# Altium PCB 1050.PcbDoc
Units mm, origin at the board's own origin, x right, y up, seen from the top; angles counter-clockwise.
Board outline 100.33 x 100.33 mm, 2 copper layers (Top Layer, Bottom Layer); 54 components, 92 nets, 248 pads, 132 vias.
Unrouted connection lines stored in the file: 2.
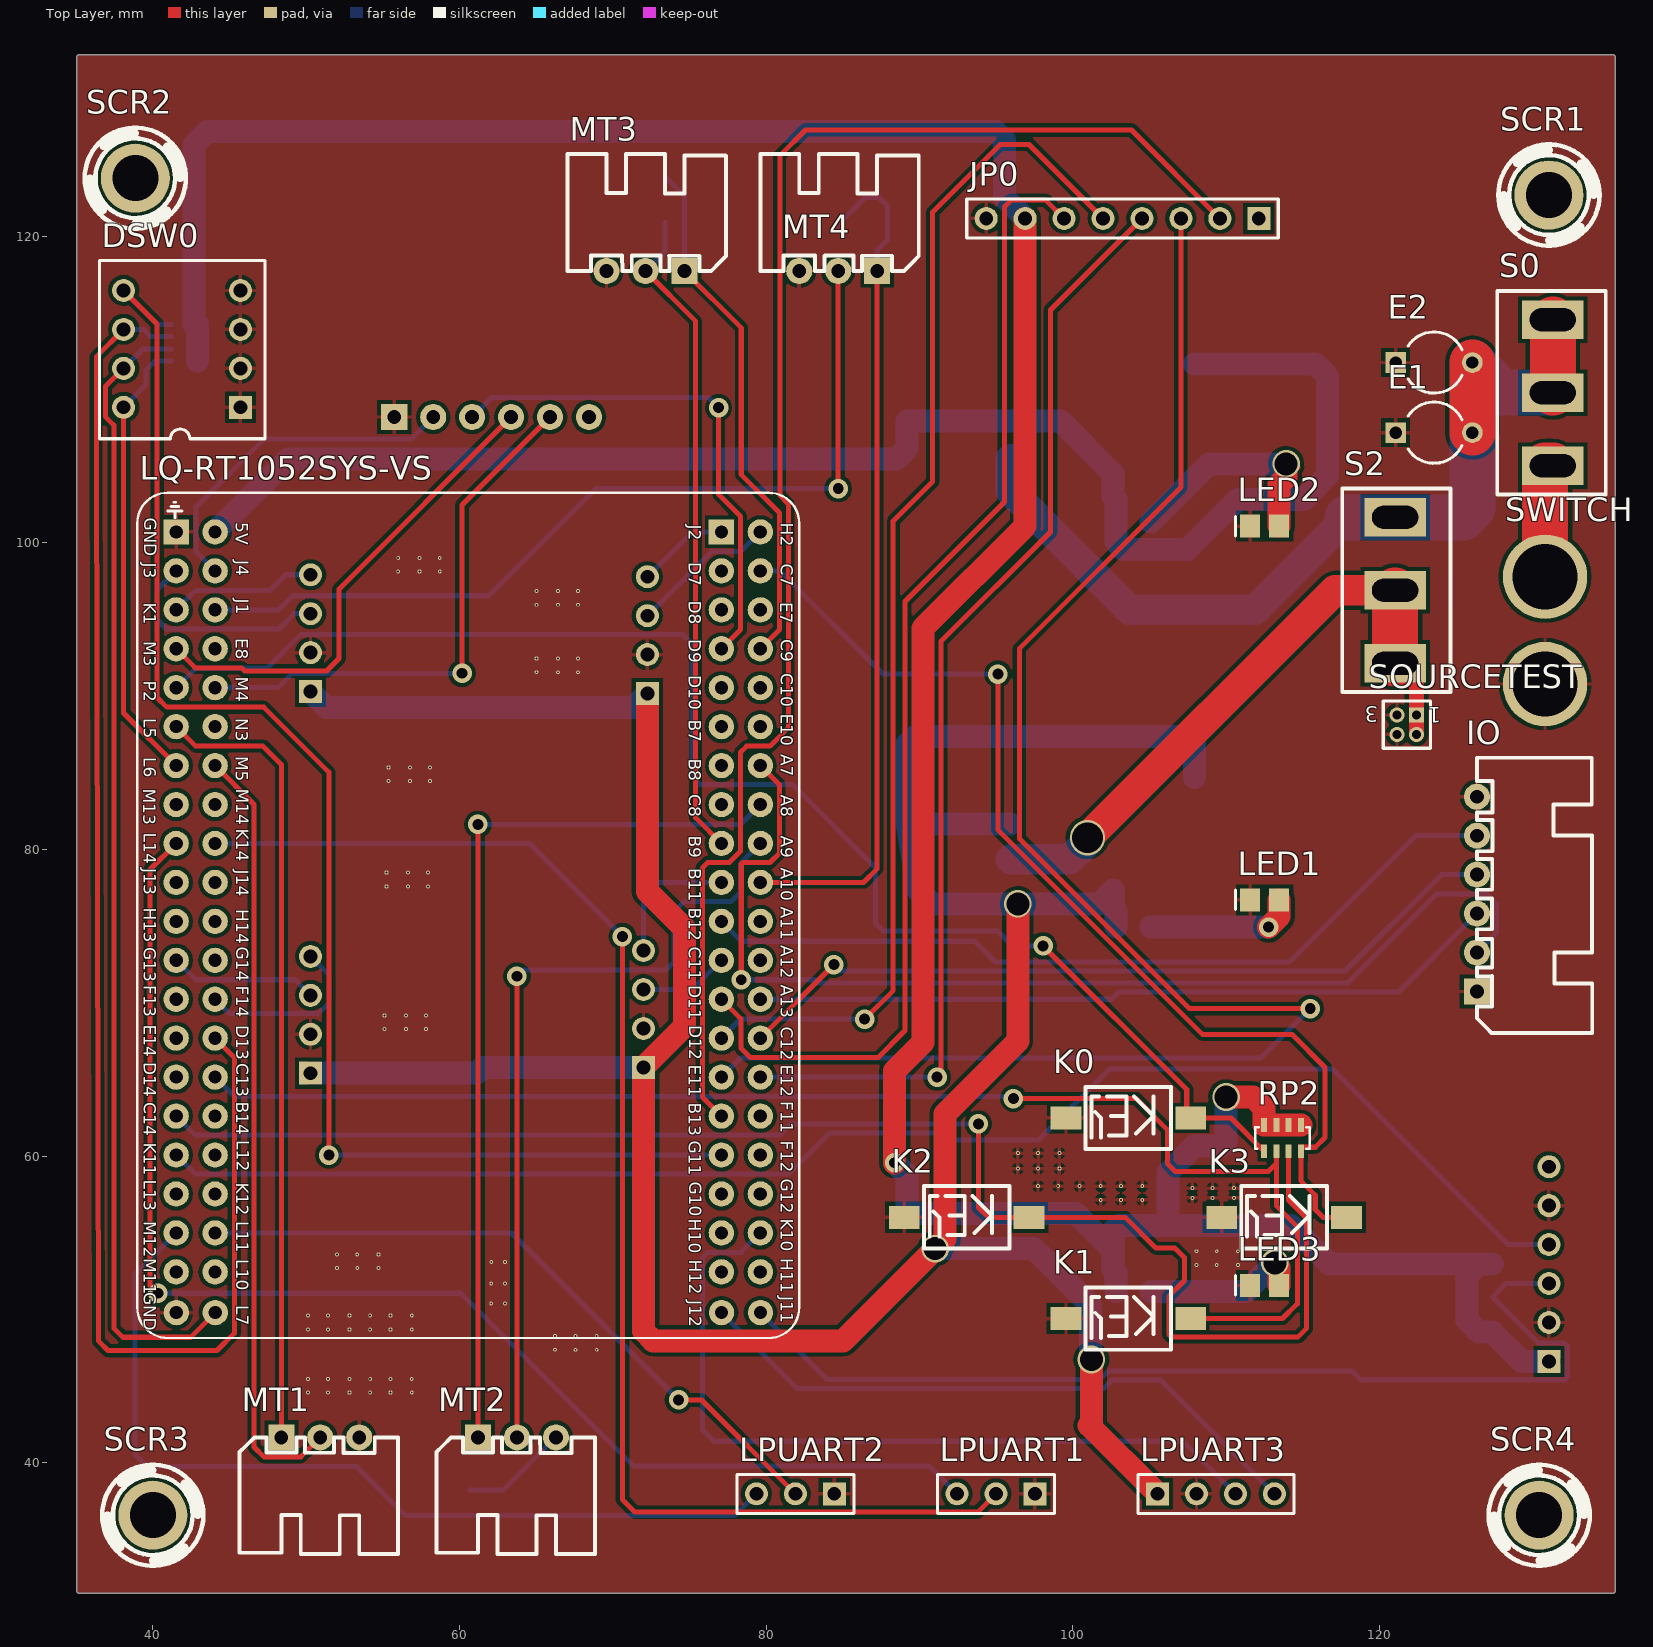
[diagram p0: Top Layer view]
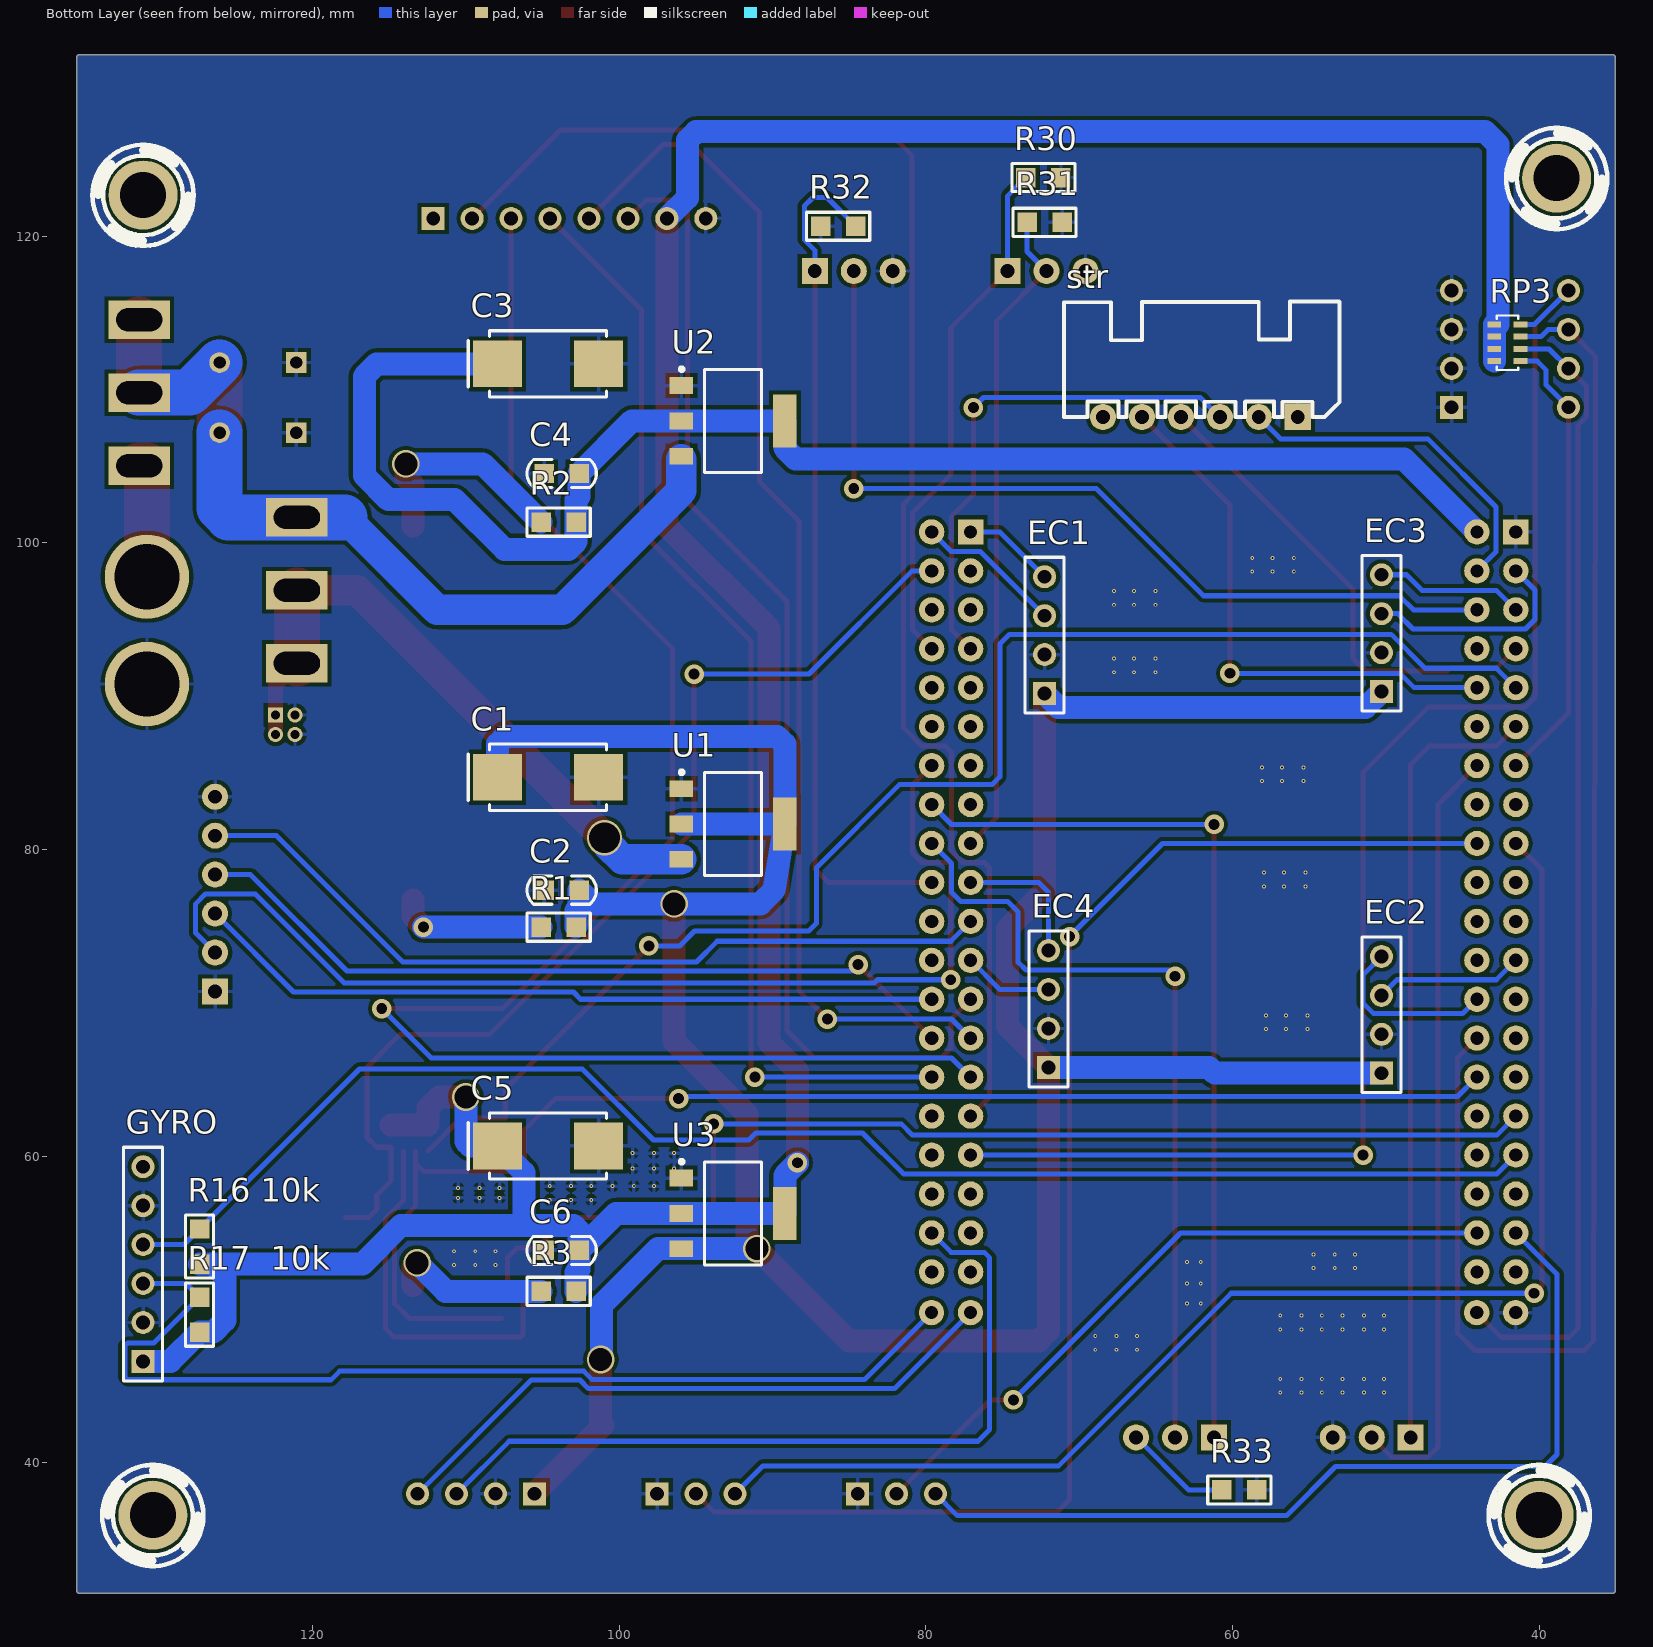
[diagram p1: Bottom Layer view, seen from below]
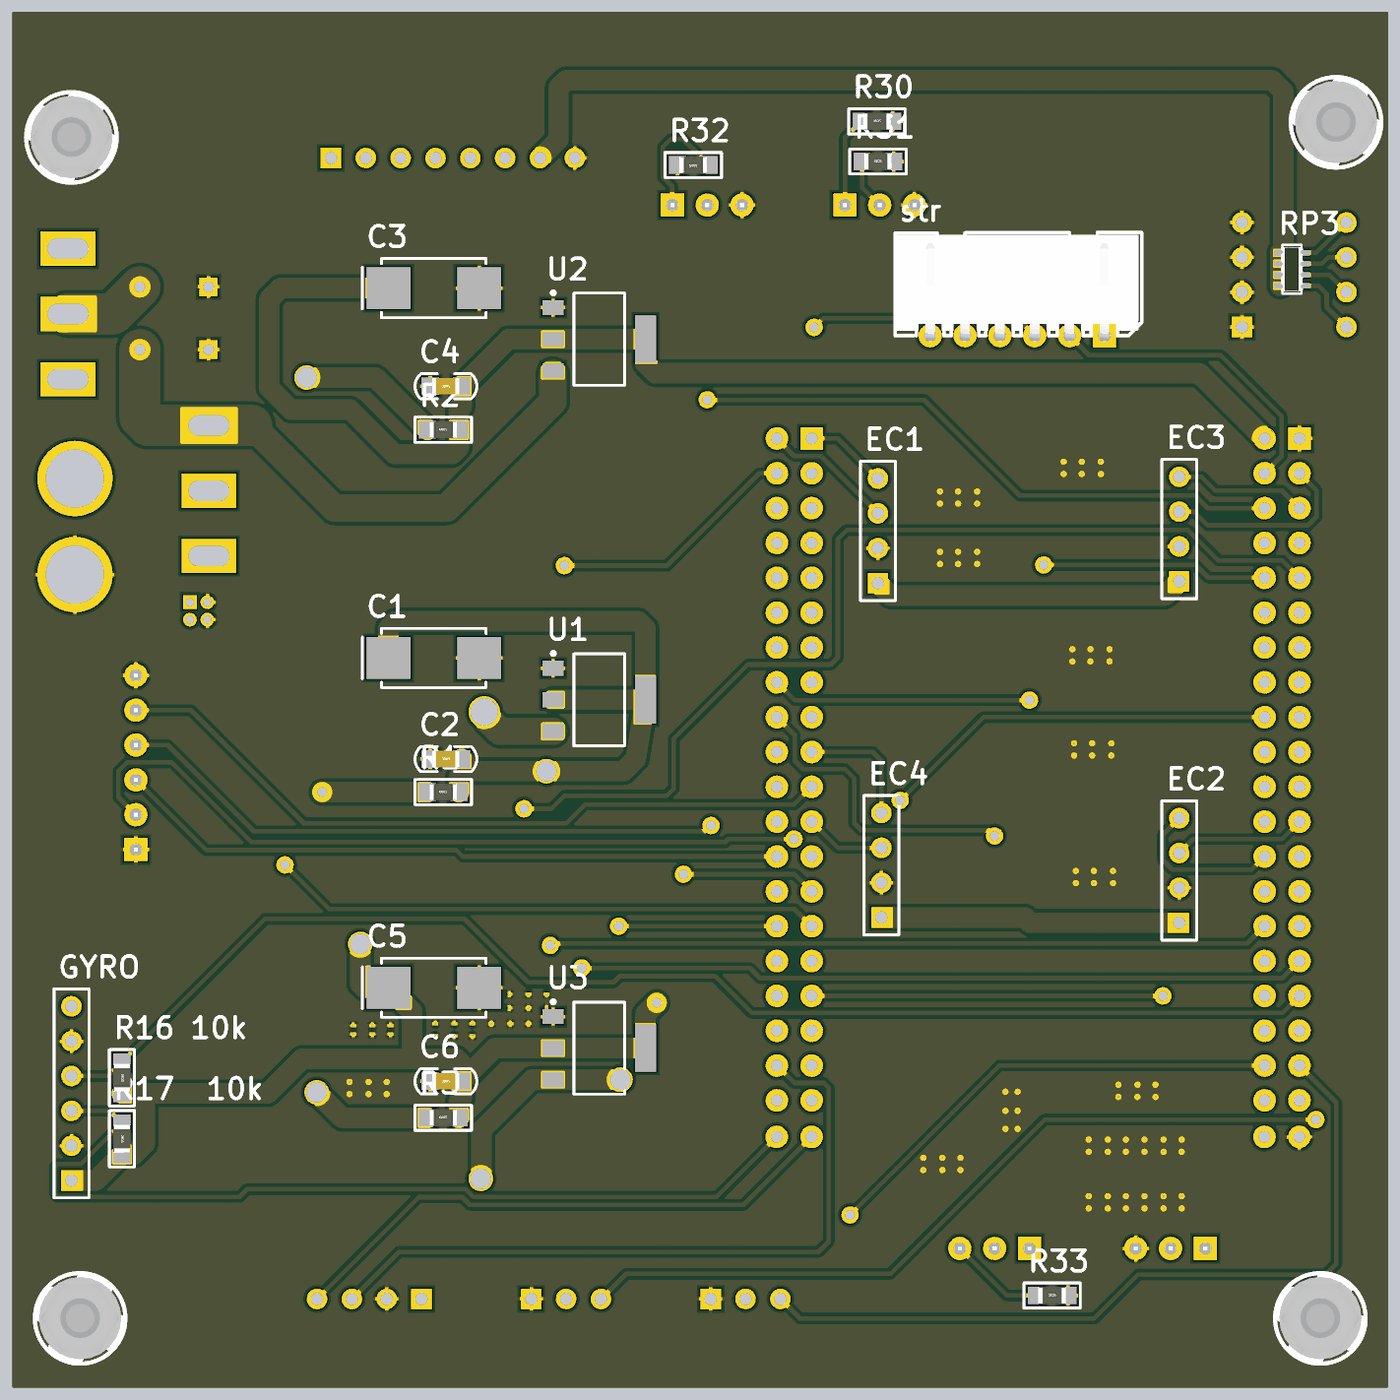
[diagram p2: 3D render of the assembled board from below, using the file's embedded part models]

## Layer stack, top to bottom
Top Solder: solder mask 0.0102, Solder Resist, Dk 3.5
Top Layer: signal copper 0.0356
Dielectric 1: dielectric 0.32, FR-4, Dk 4.8
Bottom Layer: signal copper 0.0356
Bottom Solder: solder mask 0.0102, Solder Resist, Dk 3.5

## Board outline
35.052,31.623 ccw(c35.179,31.623) 35.179,31.496 135.255,31.496 ccw(c135.255,31.623) 135.382,31.623 135.382,131.699 ccw(c135.255,131.699) 135.255,131.826 35.179,131.826 ccw(c35.179,131.699) 35.052,131.699

## Design rules (kind name [scope] priority, off if disabled: settings)
Clearance [All] p1: gap=0.254 ignorepadtopadclearanceinfootprint=FALSE except(0: Arc-Hole Track-Hole SMDPad-Hole THPad-Hole Via-Hole Fill-Hole Poly-Hole Region-Hole Text-Hole)
HoleSize HoleSize_1 [IsVia] p1: absolutevalues=TRUE maxlimit=4 minlimit=0.254 maxpercent=80.000 minpercent=20.000
HoleSize [All] p2: absolutevalues=TRUE maxlimit=4 minlimit=0.025 maxpercent=80.000 minpercent=20.000
PolygonConnect [All] p1: connectstyle=Relief reliefconductorwidth=0.254 reliefentries=4 polygonreliefangle="90 Angle" airgapwidth=0.254
RoutingVias [All] p1: holewidth=0.711 width=1.27 viastyle="Through Hole" minholewidth=0.711 minwidth=1.27 maxholewidth=0.711 maxwidth=1.27
SolderMaskExpansion [All] p1: expansion=0.102
Width Width_1 [InNetClass('New Class')] p1: maxlimit=3 minlimit=0.254 preferedwidth=0.33 minimp=50.000000 maximp=50.000000 favimp=50.000000
Width [InNetClass('电源')] p2: maxlimit=4 minlimit=0.254 preferedwidth=3 minimp=50.000000 maximp=50.000000 favimp=50.000000
Width Width1 [InNetClass('稳压')] p3: maxlimit=1.5 minlimit=0.254 preferedwidth=1.5 minimp=50.000000 maximp=50.000000 favimp=50.000000
29 further rules are at their usual default settings.

## Classes and differential pairs
net class "New Class": A7 A8 A9 A10 A11 A12 A13 B7 B8 B9 B11 B12 B13 B14 C7 C8 C9 C10 C11 C12 C13 C14 D7 D8 D9 D10 D11 D12 D13 D14 E7 E8 E10 E11 E12 E14 F11 F12 F13 F14 G10 G11 G12 G13 G14 GND H2 H10 H11 H12 H13 H14 J1 J2 J3 J4 J11 J12 J13 J14 K1 K10 K11 K12 K14 L5 L6 L7 L10 L11 L12 L13 L14 M3 M4 M5 M11 M12 M13 M14 N3 NetMT2_3 NetS0_VCC1 P2
net class 稳压: 3V3_EXT 5V_INTER 5V_OUTER NetLED1_1 NetLED2_1 NetLED3_1
net class 电源: 12V 12V_0 NetS0_VCC1

## Components (designator, comment, footprint, x,y, rotation, side; value= is the part's Value field where it differs from the comment)
C1 "Cap Pol" CAP-7343 104.648,84.709 r180 bottom value=220uF
C2 "Cap" "C 0805" 103.759,77.343 r180 bottom value=100nF
C3 "Cap Pol" CAP-7343 104.648,111.675 r180 bottom value=220uF
C4 "Cap" "C 0805" 103.759,104.521 r180 bottom value=100nF
C5 "Cap Pol" CAP-7343 104.648,60.664 r180 bottom value=220uF
C6 "Cap" "C 0805" 103.759,53.848 r180 bottom value=100nF
DSW0 "SW-DIP4" LQ_DIP-4-KEY 45.72,108.839 r90 top
E1 "220UF/16V" CAPR5-4X5 123.571,107.188 r0 top
E2 "10UF/16V" CAPR5-4X5 123.571,111.76 r0 top
EC1 "EC1" HDR1X4 72.263,90.17 r90 bottom
EC2 "EC2" HDR1X4 50.292,65.405 r90 bottom
EC3 "EC3" HDR1X4 50.292,90.297 r90 bottom
EC4 "EC4" HDR1X4 72.009,65.786 r90 bottom
GYRO "GYRO" HDR1X6 131.064,46.609 r90 bottom
IO "IO" XH2.54-6P_H 126.365,70.739 r90 top
JP0 "TFT" HDR1X8 112.141,121.158 r180 top
K0 "微动开关" surface_key 103.632,62.484 r180 top
K1 "微动开关" surface_key 103.632,49.403 r180 top
K2 "微动开关" surface_key 93.091,56.007 r180 top
K3 "微动开关" surface_key 113.792,56.007 r180 top
LED1 "LED0" LED_0805 112.522,76.708 r180 top
LED2 "LED0" LED_0805 112.522,101.092 r180 top
LED3 "LED0" LED_0805 112.522,51.562 r180 top
LPUART1 "LPUART1" HDR1X3 97.536,37.973 r180 top
LPUART2 "LPUART2" HDR1X3 84.455,37.973 r180 top
LPUART3 "HDR-1X4" HDR1X4 105.537,37.973 r0 top
LQ-RT1052SYS-VS "LQ-RT1052SYS-VC3" LQ-RT1052SYS-VC3 60.579,76.581 r270 top
MT1 "MT1" XH2.54-3P_H 48.387,41.656 r0 top
MT2 "MT2" XH2.54-3P_H 61.214,41.656 r0 top
MT3 "MT3" XH2.54-3P_H 74.676,117.729 r180 top
MT4 "MT4" XH2.54-3P_H 87.249,117.729 r180 top
R1 "Res1" "R 0805" 103.957,74.93 r180 bottom value=200R
R2 "Res1" "R 0805" 103.957,101.346 r180 bottom value=200R
R3 "Res1" "R 0805" 103.957,51.181 r180 bottom value=100R
"R16 10k" "Res1" "R 0805" 127.381,54.102 r270 bottom
"R17  10k" "Res1" "R 0805" 127.381,49.657 r270 bottom
R30 "Res1" "R 0805" 72.339,123.825 r180 bottom
R31 "Res1" "R 0805" 72.263,120.904 r180 bottom
R32 "Res1" "R 0805" 85.725,120.65 r0 bottom value=2K
R33 "Res1" "R 0805" 59.563,38.227 r180 bottom value=2K
RP2 "1K" LQ_RP4-0603 114.884,62.027 r0 top
RP3 "1K" LQ_RP4-0603 42.926,114.249 r90 bottom
S0 "Switcher" ThreeSwitcher 131.318,105.029 r270 top
S2 "Switcher" ThreeSwitcher 121.031,101.663 r90 top
SCR1 "螺丝孔" LQ_SCROW3&5mm 131.064,122.682 r0 top
SCR2 "螺丝孔" LQ_SCROW3&5mm 38.862,123.78 r0 top
SCR3 "螺丝孔" LQ_SCROW3&5mm 40.005,36.576 r0 top
SCR4 "螺丝孔" LQ_SCROW3&5mm 130.429,36.576 r0 top
SOURCETEST "SourceTest" MHDR2X2 122.428,88.773 r180 top
str "str" XH2.54-6P_H 55.753,108.204 r0 bottom
SWITCH "XT60" XT60 130.81,97.79 r0 top
U1 "LM1117-5.0" SOT-223 92.583,81.661 r270 bottom
U2 "LM1117-5.0" SOT-223 92.583,107.95 r270 bottom
U3 "LM1117-3.3" SOT-223 92.583,56.261 r270 bottom

## Footprints (in the part's own frame and the unit in brackets; to place one, negate y for a bottom-side part, rotate by r counter-clockwise, add the part's x,y. Pads: shape width x height; smd on the part's side, far side on the other; paste and mask are expansions set on the pad)
"C 0805" [mil] "无极性贴片电容"
  rect 50x50 smd: 1(-45,0) 2(45,0)
  silkscreen extent -89,-36 89,36, body extent -39,-24 39,24, height 20
CAP-7343 [mm] "钽电容"
  rect 3.2x3.05 smd: 1(-3.302,0) 2(3.302,0)
  silkscreen extent -5.21,-2.16 3.81,2.16, body extent -3.68,-1.91 3.68,1.91, height 2.95
CAPR5-4X5 [mm] "Capacitor; 2 Leads"
  rect 1.35x1.35 hole 0.8: 1(-2.5,0)
  round 1.35 hole 0.8: 2(2.5,0)
  silkscreen extent -1.69,-2 1.82,2
HDR1X3 [mm] "Connector; Header; 3 Position"
  rect 1.5x1.5 hole 0.9: 1(0,0)
  round 1.5 hole 0.9: 2(2.54,0) 3(5.08,0)
  silkscreen extent -1.27,-1.27 6.35,1.27
HDR1X4 [mm] "Connector; Header; 4 Position"
  rect 1.5x1.5 hole 0.9: 1(0,0)
  round 1.5 hole 0.9: 2(2.54,0) 3(5.08,0) 4(7.62,0)
  silkscreen extent -1.27,-1.27 8.89,1.27
HDR1X6 [mm] "Connector; Header; 6 Position"
  rect 1.5x1.5 hole 0.9: 1(0,0)
  round 1.5 hole 0.9: 2(2.54,0) 3(5.08,0) 4(7.62,0) 5(10.16,0) 6(12.7,0)
  silkscreen extent -1.27,-1.27 13.97,1.27
HDR1X8 [mm] "Connector; Header; 8 Position"
  rect 1.5x1.5 hole 0.9: 1(0,0)
  round 1.5 hole 0.9: 2(2.54,0) 3(5.08,0) 4(7.62,0) 5(10.16,0) 6(12.7,0) 7(15.24,0) 8(17.78,0)
  silkscreen extent -1.27,-1.27 19.05,1.27
LED_0805 [mm] "贴片二极管"
  rect 1.3x1.5 smd: 1(-0.95,0) 2(0.95,0)
  silkscreen extent 1.9,-0.63 1.9,0.64
LQ-RT1052SYS-VC3 [mm]
  rect 1.65x1.65 hole 0.86: 1(-24.13,-19.05) 43(-24.13,16.51)
  round 1.65 hole 0.86: 2(-24.13,-16.51) 3(-21.59,-19.05) 4(-21.59,-16.51) 5(-19.05,-19.05) 6(-19.05,-16.51) 7(-16.51,-19.05) 8(-16.51,-16.51) 9(-13.97,-19.05) 10(-13.97,-16.51) 11(-11.43,-19.05) 12(-11.43,-16.51) 13(-8.89,-19.05) 14(-8.89,-16.51) 15(-6.35,-19.05) 16(-6.35,-16.51) 17(-3.81,-19.05) 18(-3.81,-16.51) 19(-1.27,-19.05) 20(-1.27,-16.51) 21(1.27,-19.05) 22(1.27,-16.51) 23(3.81,-19.05) 24(3.81,-16.51) 25(6.35,-19.05) 26(6.35,-16.51) 27(8.89,-19.05) 28(8.89,-16.51) 29(11.43,-19.05) 30(11.43,-16.51) 31(13.97,-19.05) 32(13.97,-16.51) 33(16.51,-19.05) 34(16.51,-16.51) 35(19.05,-19.05) 36(19.05,-16.51) 37(21.59,-19.05) 38(21.59,-16.51) 39(24.13,-19.05) 40(24.13,-16.51) 41(26.79,-19.04) 42(26.79,-16.5) 44(-24.13,19.05) 45(-21.59,16.51) 46(-21.59,19.05) 47(-19.05,16.51) 48(-19.05,19.05) 49(-16.51,16.51) 50(-16.51,19.05) 51(-13.97,16.51) 52(-13.97,19.05) 53(-11.43,16.51) 54(-11.43,19.05) 55(-8.89,16.51) 56(-8.89,19.05) 57(-6.35,16.51) 58(-6.35,19.05) 59(-3.81,16.51) 60(-3.81,19.05) 61(-1.27,16.51) 62(-1.27,19.05) 63(1.27,16.51) 64(1.27,19.05) 65(3.81,16.51) 66(3.81,19.05) 67(6.35,16.51) 68(6.35,19.05) 69(8.89,16.51) 70(8.89,19.05) 71(11.43,16.51) 72(11.43,19.05) 73(13.97,16.51) 74(13.97,19.05) 75(16.51,16.51) 76(16.51,19.05) 77(19.05,16.51) 78(19.05,19.05) 79(21.59,16.51) 80(21.59,19.05) 81(24.13,16.51) 82(24.13,19.05) 83(26.79,16.52) 84(26.79,19.06)
  silkscreen extent -26.69,-21.59 28.45,21.59
LQ_DIP-4-KEY [mm]
  rect 1.5x1.5 hole 0.9: 1(0,0)
  round 1.5 hole 0.9: 2(2.54,0) 3(5.08,0) 4(7.62,0) 5(7.62,7.62) 6(5.08,7.62) 7(2.54,7.62) 8(0,7.62)
  silkscreen extent -2.05,-1.59 9.57,9.2
LQ_RP4-0603 [mm]
  rect 0.4x0.889 smd: 1(-2.4,-1.702) 2(-1.6,-1.702) 3(-0.8,-1.702) 4(0,-1.702) 5(0,0) 6(-0.8,0) 7(-1.6,0) 8(-2.4,0)
  silkscreen extent -2.98,-1.55 0.58,-0.15, body extent -2.8,-1.64 0.4,-0.04, height 0.55
LQ_SCROW3&5mm [mm]
  round 4.5 hole 3: 1(0,0)
  silkscreen extent -3.3,-3.3 3.3,3.3, body extent -3,-3 3,3, height 1.3
MHDR2X2 [mm] "Connector; Header; 2x2 Position"
  rect 1x1 hole 0.6: 1(0,0)
  round 1 hole 0.6: 2(0,1.27) 3(1.27,0) 4(1.27,1.27)
  silkscreen extent -0.9,-0.9 2.17,2.17
"R 0805" [mil] "1/8W贴片电阻"
  rect 50x50 smd: 1(-45,0) 2(45,0)
  silkscreen extent -81,-36 81,36, body extent -39,-25 39,25, height 20
SOT-223 [mm]
  rect 1.1x1.55 smd: 1(-2.3,-3.375) 2(0,-3.375) 3(2.3,-3.375)
  rect 3.45x1.55 smd: 4(0,3.375)
  silkscreen extent -3.5,-3.48 3.35,1.85, body extent -3.3,-3.94 3.3,3.43, height 0.8
surface_key [mm]
  rect 2x1.5 smd: 1(4.064,0) 2(-4.064,0)
  silkscreen extent -2.79,-2.03 2.79,2.03
ThreeSwitcher [mm]
  rect 2.5x4 hole 1.5 slot 3 at 90 deg: 1(0,0) 2(-4.763,0) 3(-9.525,0)
  silkscreen extent -11.4,-3.62 1.87,3.45
XH2.54-3P_H [mm] "接插件，3P"
  rect 1.7x1.7 hole 0.9: 1(0,0)
  round 1.7 hole 0.9: 2(2.54,0) 3(5.08,0)
  silkscreen extent -2.72,-7.62 7.62,0, body extent -2.5,-7.35 7.58,0.35, height 5.73
XH2.54-6P_H [mm] "接插件，6P"
  rect 1.7x1.7 hole 0.9: 1(0,0)
  round 1.7 hole 0.9: 2(2.54,0) 3(5.08,0) 4(7.62,0) 5(10.16,0) 6(12.7,0)
  silkscreen extent -2.72,-7.53 15.24,0, body extent -2.5,-7.35 15.2,0.35, height 5.75
XT60 [mm]
  round 5.5 hole 4.25: 0(0,0) 1(0,-7)

## Part data
C1 C3 C5: "极性电解电容", LatestRevisionDate=17-Jul-2002, LatestRevisionNote="Re-released for DXP Platform.", PackageReference=RB7.6-15, Published=8-Jun-2000, Publisher="Altium Limited", Vol=35V
C2 C4 C6: "无极性电容", LatestRevisionDate=17-Jul-2002, LatestRevisionNote="Re-released for DXP Platform.", PackageReference=RAD-0.3, Published=8-Jun-2000, Publisher="Altium Limited"
E1 E2: library part C-CAP, "直插电解电容", BOM名称=直插电解电容, 学习资源=https://lmdzstyle.taobao.com/, 版权归属=黎明电子style
EC1 EC2 EC3 EC4: library part "Header 4", "Header, 4-Pin", LatestRevisionDate=17-Jul-2002, LatestRevisionNote="Re-released for DXP Platform.", Publisher="Altium Limited"
GYRO: library part "Header 6", "Header, 6-Pin", LatestRevisionDate=17-Jul-2002, LatestRevisionNote="Re-released for DXP Platform.", Publisher="Altium Limited"
IO str: library part MHDR1X6, "Header, 6-Pin", LatestRevisionDate=17-Jul-2002, LatestRevisionNote="Re-released for DXP Platform.", Publisher="Altium Limited"
JP0: library part "Header 8", "Header, 8-Pin", LatestRevisionDate=17-Jul-2002, LatestRevisionNote="Re-released for DXP Platform.", Publisher="Altium Limited"
LED1 LED2 LED3: "发光二极管", LatestRevisionDate=08-Jul-2005, LatestRevisionNote="Mech Layer 1 removed.", PackageReference=LED-0, Published=8-Jun-2000, Publisher="Altium Limited"
LPUART1 LPUART2 MT1 MT2 MT3 MT4: library part "Header 3", "Header, 3-Pin", LatestRevisionDate=17-Jul-2002, LatestRevisionNote="Re-released for DXP Platform.", Publisher="Altium Limited"
LPUART3: library part "Header 4", "4P接插件", BOM名称=4P接插件, 学习资源=https://lmdzstyle.taobao.com/, 版权归属=黎明电子style
R1 R2 R3 "R16 10k" "R17  10k" R30 R31 R32 R33: "贴片电阻", LatestRevisionDate=17-Jul-2002, LatestRevisionNote="Re-released for DXP Platform.", PackageReference=AXIAL-0.4, Published=8-Jun-2000, Publisher="Altium Limited"
RP2 RP3: library part B型贴片阻排—8
S0 S2: library part 3_Switcher
SCR1 SCR2 SCR3 SCR4: library part CON1, "Connector"
SOURCETEST: library part "Header 2X2", "Header, 2-Pin, Dual row", LatestRevisionDate=17-Jul-2002, LatestRevisionNote="Re-released for DXP Platform.", Publisher="Altium Limited"
U1 U2: library part SPX1117M3-5.0, "5.0V稳压芯片"
U3: library part ASM1117, "3.3V稳压芯片"
DSW0: =24-Mar-1999

## Via types
v1: diameter 0.254, hole 0.127, Top Layer to Bottom Layer, 105 vias
v2: diameter 1.27, hole 0.711, Top Layer to Bottom Layer, 20 vias
v3: diameter 1.8, hole 1.5, Top Layer to Bottom Layer, 6 vias
v4: diameter 2.3, hole 2, Top Layer to Bottom Layer, 1 vias

## Nets (pads, with @x,y where several pads share a name; then routed paths per layer and width w, separated by ;. In a path a pad name is that pad's centre, name@x,y a point inside that pad or via, vN(x,y) a via of type N, cw(c..) or ccw(c..) an arc to the next point about the centre after c; other vN are vias at no path point)
3V3_EXT: "R16 10k.2" "R17  10k.2" C5.1 C6.2 GYRO.1 JP0.7 R3.2 RP2.5 RP2.6 RP2.7 RP2.8 RP3.5 RP3.6 RP3.7 RP3.8 U3.2 U3.4 | length 214.3
  Top Layer w1.5: v2(88.392,59.566) 88.392,65.565 90.233,67.407 90.233,73.406 90.233,94.424 96.901,101.092 JP0.7 ; v3(110.007,63.856) 111.76,63.856 112.484,63.132 RP2.8 RP2.7 RP2.6 RP2.5
  Bottom Layer w1.5: RP3.8 RP3.7 RP3.6 RP3.5 42.697,114.249 42.697,125.984 43.536,126.822 94.996,126.822 95.555,126.263 95.555,122.504 JP0.7 ; v2(88.392,59.566) 89.208,58.75 U3.4 U3.2 100.203,56.261 C6.2 ; R3.2 102.814,52.4 102.616,52.598 C6.2 ; v3(110.007,63.856) 110.007,60.943 109.728,60.664 C5.1 106.22,58.928 106.22,55.487 ; 127.381,52.959 126.492,52.959 ; GYRO.1 129.286,46.609 127.381,48.514 126.492,48.514 125.73,49.276 125.73,52.197 126.492,52.959 ; C6.2 102.616,55.118 102.985,55.487 106.22,55.487 ; 106.22,55.487 114.239,55.487 116.767,52.959 126.492,52.959
5V_INTER: C3.1 C4.2 LQ-RT1052SYS-VS.2 R2.2 U2.2 U2.4 | length 100.1
  Bottom Layer w1.5: LQ-RT1052SYS-VS.2 48.819,105.461 88.497,105.461 89.208,106.172 U2.4 U2.2 99.187,107.95 C4.2 102.616,103.017 102.814,102.819 R2.2 102.814,100.076 103.322,99.568 107.493,99.568 110.744,102.819 115.062,102.819 116.637,104.394 116.637,110.863 115.824,111.675 C3.1
5V_OUTER: C1.1 C2.2 EC1.1 EC2.1 EC3.1 EC4.1 LPUART3.1 R1.2 U1.2 U1.4 U3.3 | length 214.3
  Top Layer w1.5: EC1.1 72.263,77.268 74.676,74.855 74.676,68.453 EC4.1 72.009,48.59 72.644,47.955 85.028,47.955 v3(91.034,53.961) 91.682,54.609 91.682,62.751 96.43,67.5 v3(96.43,76.454) ; v3(101.219,46.736) 101.219,42.596 101.067,42.443 LPUART3.1
  Bottom Layer w1.5: EC2.1 61.163,65.405 61.544,65.786 EC4.1 ; EC3.1 51.332,89.257 71.35,89.257 EC1.1 ; v3(91.034,53.961) U3.3 97.485,53.961 101.175,50.271 101.175,46.78 v3(101.219,46.736) ; U1.2 U1.4 ; R1.2 102.814,76.022 102.616,76.22 C2.2 101.727,76.454 v3(96.43,76.454) 90.805,76.454 89.916,77.343 U1.4 ; C1.1 107.95,86.868 107.442,87.376 89.716,87.376 89.208,86.868 U1.4
12V: S2.2 S2.3 SOURCETEST.1 SOURCETEST.2 U1.3 | length 41.9
  Top Layer w1: S2.3 122.428,90.742 SOURCETEST.1 SOURCETEST.2
  Top Layer w2: v4(100.965,80.772) 117.094,96.901 S2.2
  Top Layer w3: S2.3 S2.2
  Bottom Layer w2: U1.3 99.808,79.361 v4@100.711,80.264
12V_0: E1.2 E2.2 S0.2 S0.3 S2.1 U2.3 | length 58.5
  Top Layer w3: E1.2 E2.2 ; S0.2 S0.3
  Bottom Layer w2: U2.3@95.958,105.446 95.958,103.391 103.718,95.631 111.887,95.631 117.919,101.663
  Bottom Layer w3: 117.919,101.663 S2.1 125.476,101.663 126.071,102.259 E1.2 ; E2.2 128.04,109.791 S0.2
A7: IO.2 LQ-RT1052SYS-VS.56 | length 72.3
  Top Layer w0.33: v2(78.384,71.501) 78.384,79.037 78.494,79.147 80.264,79.147 80.873,79.756 80.873,84.227 LQ-RT1052SYS-VS.56
  Bottom Layer w0.33: v2(78.384,71.501) 83.159,71.501 83.376,71.284 117.944,71.284 123.749,77.089 127,77.089 127.635,76.454 127.635,74.549 IO.2
A8: LQ-RT1052SYS-VS.58 MT2.1 | length 58.9
  Top Layer w0.33: MT2.1 v2(61.214,81.636)
  Bottom Layer w0.33: v2(61.214,81.636) 78.334,81.636 LQ-RT1052SYS-VS.58
A9: LQ-RT1052SYS-VS.60 MT2.2 | length 52.6
  Top Layer w0.33: MT2.2 v2(63.754,71.73)
  Bottom Layer w0.33: v2(63.754,71.73) 64.16,72.136 73.482,72.136 73.99,72.644 73.99,75.921 74.676,76.606 77.724,76.606 78.334,77.216 78.334,79.096 LQ-RT1052SYS-VS.60
A10: LQ-RT1052SYS-VS.62 MT4.1 R32.1 | length 55.9
  Top Layer w0.33: LQ-RT1052SYS-VS.62 86.36,77.851 87.249,78.74 MT4.1
  Bottom Layer w0.33: R32.1 86.462,122.53 87.376,122.53 87.935,121.971 87.935,119.761 87.249,119.075 MT4.1
A11: LQ-RT1052SYS-VS.64
A12: LQ-RT1052SYS-VS.66
A13: IO.3 LQ-RT1052SYS-VS.68 | length 49.1
  Bottom Layer w0.33: LQ-RT1052SYS-VS.68 102.528,70.231 102.997,70.7 121.246,70.7 IO.3
B7: LQ-RT1052SYS-VS.53
B8: LQ-RT1052SYS-VS.57
B9: LQ-RT1052SYS-VS.59 MT3.2 R31.1 | length 43.1
  Top Layer w0.33: MT3.2 75.413,114.452 75.413,82.067 LQ-RT1052SYS-VS.59
  Bottom Layer w0.33: MT3.2 73.406,118.999 R31.1
B11: EC4.4 LQ-RT1052SYS-VS.61 | length 9.2
  Bottom Layer w0.33: EC4.4 72.009,77.216 72.644,77.851 LQ-RT1052SYS-VS.61
B12: IO.5 LQ-RT1052SYS-VS.63 | length 53.8
  Bottom Layer w0.33: LQ-RT1052SYS-VS.63 78.384,74.016 93.615,74.016 94.974,72.657 114.122,72.657 122.365,80.899 IO.5
B13: JP0.2 LQ-RT1052SYS-VS.73 | length 99.2
  Top Layer w0.33: LQ-RT1052SYS-VS.73 75.845,63.855 75.845,78.792 76.2,79.147 77.604,79.147 78.333,79.876 78.333,86.334 78.74,86.741 80.264,86.741 81.457,87.934 81.457,102.539 80.899,103.098 80.899,125.247 82.575,126.924 103.835,126.924 JP0.2
B14: LQ-RT1052SYS-VS.32
C7: K3.2 LQ-RT1052SYS-VS.46 RP2.4 | length 69.3
  Top Layer w0.33: v2(95.123,91.44) 95.123,81.28 108.458,67.945 114.3,67.945 116.459,65.786 116.459,61.214 115.824,60.579 114.884,60.579 RP2.4 114.884,58.395 115.824,57.455 115.824,56.515 116.332,56.007 K3.2
  Bottom Layer w0.33: LQ-RT1052SYS-VS.46 80.899,98.171 87.63,91.44 v2(95.123,91.44)
C8: LQ-RT1052SYS-VS.55
C9: LQ-RT1052SYS-VS.50 MT3.1 R30.1 | length 34.3
  Top Layer w0.33: MT3.1 78.384,114.021 78.384,104.444 80.873,101.955 80.873,94.335 LQ-RT1052SYS-VS.50
  Bottom Layer w0.33: R30.1 74.676,122.631 MT3.1
C10: LQ-RT1052SYS-VS.52
C11: EC4.3 LQ-RT1052SYS-VS.65 | length 5.9
  Bottom Layer w0.33: EC4.3 75.184,70.866 LQ-RT1052SYS-VS.65
C12: IO.4 LQ-RT1052SYS-VS.70 | length 51.5
  Top Layer w0.33: LQ-RT1052SYS-VS.70 v2(84.43,72.492)
  Bottom Layer w0.33: v2(84.43,72.492) 84.849,72.072 117.767,72.072 124.054,78.359 IO.4
C13: K1.2 LQ-RT1052SYS-VS.30 RP2.2 | length 91.2
  Top Layer w0.33: v2(96.139,63.754) 104.14,63.754 106.172,61.722 106.172,59.512 106.68,59.004 112.776,59.004 113.284,59.512 ; K1.2 113.69,49.403 114.656,50.368 114.656,55.395 113.284,56.766 113.284,59.512 ; RP2.2 113.284,59.512
  Bottom Layer w0.33: LQ-RT1052SYS-VS.30 45.339,63.881 96.012,63.881 v2(96.139,63.754)
C14: K2.2 LQ-RT1052SYS-VS.31 RP2.3 | length 100.2
  Top Layer w0.33: v2(93.853,62.103) 93.853,56.642 94.488,56.007 K2.2 103.429,56.007 105.44,53.996 106.68,53.996 107.302,53.373 107.302,51.88 106.274,50.851 106.274,48.362 106.426,48.209 114.706,48.209 115.24,48.743 115.24,55.956 114.084,57.112 RP2.3
  Bottom Layer w0.33: LQ-RT1052SYS-VS.31 42.773,61.367 80.874,61.367 81.61,62.103 v2(93.853,62.103)
D7: LQ-RT1052SYS-VS.45
D8: LQ-RT1052SYS-VS.47
D9: LQ-RT1052SYS-VS.49 str.3 | length 33.7
  Top Layer w0.33: v2(76.911,108.814) 76.911,103.149 78.333,101.727 78.333,94.335 LQ-RT1052SYS-VS.49
  Bottom Layer w0.33: str.3 62.103,109.474 76.251,109.474 v2(76.911,108.814)
D10: LQ-RT1052SYS-VS.51
D11: JP0.6 LQ-RT1052SYS-VS.67 | length 76.4
  Top Layer w0.33: LQ-RT1052SYS-VS.67 78.359,68.961 78.359,67.056 78.994,66.421 87.3,66.421 89.064,68.186 89.064,96.177 95.555,102.668 95.555,121.92 95.987,122.352 98.247,122.352 JP0.6
D12: JP0.5 LQ-RT1052SYS-VS.69 | length 79.3
  Top Layer w0.33: v2(86.436,68.936) 88.29,70.79 88.29,101.422 90.856,103.988 90.856,121.564 95.275,125.984 97.155,125.984 JP0.5
  Bottom Layer w0.33: LQ-RT1052SYS-VS.69 78.334,68.936 v2(86.436,68.936)
D13: DSW0.6 LQ-RT1052SYS-VS.28 RP3.3 | length 99.4
  Top Layer w0.33: DSW0.6 36.322,112.141 36.322,105.918 36.474,47.93 37.084,47.32 44.196,47.32 45.323,48.447 45.323,66.437 LQ-RT1052SYS-VS.28
  Bottom Layer w0.33: DSW0.6 39.421,113.919 39.891,113.449 RP3.3
D14: LQ-RT1052SYS-VS.29
E7: LQ-RT1052SYS-VS.48
E8: LQ-RT1052SYS-VS.8
E10: LQ-RT1052SYS-VS.54
E11: JP0.3 LQ-RT1052SYS-VS.71 | length 108.6
  Top Layer w0.33: JP0.3 107.061,103.632 96.52,93.091 96.52,80.709 107.608,69.621 v2(115.494,69.621)
  Bottom Layer w0.33: LQ-RT1052SYS-VS.71 78.334,66.396 112.268,66.396 v2(115.494,69.621)
E12: JP0.4 LQ-RT1052SYS-VS.72 | length 73.1
  Top Layer w0.33: v2(91.161,65.151) 91.403,65.393 91.403,76.2 91.403,93.562 98.552,100.711 98.552,115.189 JP0.4
  Bottom Layer w0.33: LQ-RT1052SYS-VS.72 v2(91.161,65.151)
E14: LQ-RT1052SYS-VS.27
F11: LQ-RT1052SYS-VS.74
F12: LQ-RT1052SYS-VS.76
F13: LQ-RT1052SYS-VS.25
F14: EC2.4 LQ-RT1052SYS-VS.26 | length 11.6
  Bottom Layer w0.33: LQ-RT1052SYS-VS.26 45.009,69.291 50.8,69.291 51.486,69.977 51.486,71.831 EC2.4
G10: LQ-RT1052SYS-VS.77
G11: DSW0.5 LQ-RT1052SYS-VS.75 RP3.4 | length 95.3
  Top Layer w0.33: DSW0.5 40.284,114.275 40.284,89.916 40.919,89.281 47.244,89.281 51.486,85.039 v2(51.486,60.071)
  Bottom Layer w0.33: DSW0.5 40.31,114.249 RP3.4 ; v2(51.486,60.071) LQ-RT1052SYS-VS.75
G12: LQ-RT1052SYS-VS.78
G13: EC2.3 LQ-RT1052SYS-VS.23 | length 9.7
  Bottom Layer w0.33: LQ-RT1052SYS-VS.23 42.799,71.501 49.276,71.501 EC2.3
G14: LQ-RT1052SYS-VS.24
GND: C1.2 C2.1 C3.2 C4.1 C5.2 C6.1 DSW0.1 DSW0.2 DSW0.3 DSW0.4 E1.1 E2.1 EC1.2 EC2.2 EC3.2 EC4.2 GYRO.2 GYRO.5 IO.1 IO.6 JP0.8 K0.1 K1.1 K2.1 K3.1 LED1.2 LED2.2 LED3.2 LPUART1.1 LPUART2.1 LPUART3.2 LQ-RT1052SYS-VS.1 LQ-RT1052SYS-VS.41 MT1.3 MT3.3 MT4.3 R30.2 R31.2 R32.2 R33.2 SOURCETEST.3 SOURCETEST.4 str.1 SWITCH.1 U1.1 U2.1 U3.1
  other v1: 50.12,44.577 51.435,44.577 52.829,44.577 54.184,44.577 55.499,44.577 56.893,44.577 50.12,45.466 51.435,45.466 52.829,45.466 54.184,45.466 55.499,45.466 56.893,45.466 66.249,47.371 67.564,47.371 68.958,47.371 66.249,48.26 67.564,48.26 68.958,48.26 50.12,48.703 51.435,48.703 52.829,48.703 54.184,48.703 55.499,48.703 56.893,48.703 50.12,49.592 51.435,49.592 52.829,49.592 54.184,49.592 55.499,49.592 56.893,49.592 62.078,50.374 62.967,50.374 62.078,51.689 62.967,51.689 52.025,52.705 53.34,52.705 54.734,52.705 108.083,52.907 109.398,52.907 110.792,52.907 62.078,53.083 62.967,53.083 52.025,53.594 53.34,53.594 54.734,53.594 108.083,53.796 109.398,53.796 110.792,53.796 101.831,57.15 103.146,57.15 104.54,57.15 107.808,57.277 109.123,57.277 110.517,57.277 107.808,57.912 109.123,57.912 110.517,57.912 97.743,58.039 99.058,58.039 100.452,58.039 101.831,58.039 103.146,58.039 104.54,58.039 96.429,59.182 97.744,59.182 99.138,59.182 96.429,60.198 97.744,60.198 99.138,60.198 55.121,68.291 56.515,68.291 57.83,68.291 55.121,69.18 56.515,69.18 57.83,69.18 55.248,77.597 56.642,77.597 57.957,77.597 55.248,78.486 56.642,78.486 57.957,78.486 55.375,84.455 56.769,84.455 58.084,84.455 55.375,85.344 56.769,85.344 58.084,85.344 65.027,91.559 66.421,91.559 67.736,91.559 65.027,92.448 66.421,92.448 67.736,92.448 65.027,95.959 66.421,95.959 67.736,95.959 65.027,96.848 66.421,96.848 67.736,96.848 56.01,98.125 57.404,98.125 58.719,98.125 56.01,99.014 57.404,99.014 58.719,99.014
H2: EC1.3 LQ-RT1052SYS-VS.44 | length 9.6
  Bottom Layer w0.33: EC1.3 76.454,99.441 78.359,99.441 LQ-RT1052SYS-VS.44
H10: LQ-RT1052SYS-VS.79
H11: LQ-RT1052SYS-VS.82
H12: LQ-RT1052SYS-VS.81
H13: LQ-RT1052SYS-VS.21
H14: LQ-RT1052SYS-VS.22
J1: LQ-RT1052SYS-VS.6 MT4.2 | length 58.1
  Top Layer w0.33: v2(84.709,103.53) MT4.2
  Bottom Layer w0.33: LQ-RT1052SYS-VS.6 48.208,95.631 49.124,96.546 61.901,96.546 68.885,103.53 v2(84.709,103.53)
J2: EC1.4 LQ-RT1052SYS-VS.43 | length 6
  Bottom Layer w0.33: EC1.4 75.184,100.711 LQ-RT1052SYS-VS.43
J3: EC3.3 LQ-RT1052SYS-VS.3 | length 14.4
  Bottom Layer w0.33: LQ-RT1052SYS-VS.3 40.284,96.926 40.284,94.996 40.894,94.386 48.234,94.386 49.224,95.377 EC3.3
J4: LQ-RT1052SYS-VS.4 str.2 | length 22.6
  Bottom Layer w0.33: LQ-RT1052SYS-VS.4 42.824,99.416 42.824,102.337 47.269,106.782 56.871,106.782 str.2
J11: "R17  10k.1" GYRO.3 LQ-RT1052SYS-VS.84 | length 67.2
  Bottom Layer w0.33: LQ-RT1052SYS-VS.84 84.013,45.417 101.765,45.417 102.322,45.974 118.237,45.974 118.796,45.415 132.08,45.415 132.258,45.593 132.258,47.625 132.08,47.803 130.378,47.803 127.381,50.8 128.27,51.689 GYRO.3
J12: LPUART3.4 LQ-RT1052SYS-VS.83 | length 41.4
  Bottom Layer w0.33: LQ-RT1052SYS-VS.83 82.057,44.833 102.007,44.833 102.564,45.39 105.74,45.39 LPUART3.4
J13: LQ-RT1052SYS-VS.19
J14: LQ-RT1052SYS-VS.20
K1: EC3.4 LQ-RT1052SYS-VS.5 | length 9.7
  Bottom Layer w0.33: LQ-RT1052SYS-VS.5 42.799,96.901 47.65,96.901 48.666,97.917 EC3.4
K10: LPUART3.3 LQ-RT1052SYS-VS.80 | length 52.2
  Bottom Layer w0.33: LQ-RT1052SYS-VS.80 78.359,53.721 76.2,53.721 75.844,53.365 75.844,42.164 76.606,41.402 107.188,41.402 LPUART3.3
K11: "R16 10k.1" GYRO.4 LQ-RT1052SYS-VS.33 | length 98
  Bottom Layer w0.33: LQ-RT1052SYS-VS.33 42.773,58.827 81.457,58.827 84.137,61.506 91.097,61.506 91.554,61.049 97.777,61.049 102.413,65.684 116.942,65.684 127.381,55.245 128.397,54.229 GYRO.4
K12: LQ-RT1052SYS-VS.36
K14: LPUART1.2 LQ-RT1052SYS-VS.18 | length 91
  Top Layer w0.33: v2(70.637,74.32) 70.637,37.592 71.45,36.779 93.802,36.779 LPUART1.2
  Bottom Layer w0.33: LQ-RT1052SYS-VS.18 64.567,80.391 v2(70.637,74.32)
L5: LQ-RT1052SYS-VS.11 MT1.1 | length 51.8
  Top Layer w0.33: LQ-RT1052SYS-VS.11 42.799,86.741 47.193,86.741 48.387,85.547 MT1.1
L6: DSW0.8 LQ-RT1052SYS-VS.13 RP3.1 | length 29.7
  Top Layer w0.33: DSW0.8 38.1,88.9 LQ-RT1052SYS-VS.13
  Bottom Layer w0.33: DSW0.8 39.548,110.287 39.548,111.265 40.132,111.849 RP3.1
L7: DSW0.7 LQ-RT1052SYS-VS.42 RP3.2 | length 74.5
  Top Layer w0.33: DSW0.7 36.91,110.189 36.91,108.225 37.465,107.671 37.465,48.768 38.049,48.184 42.472,48.184 LQ-RT1052SYS-VS.42
  Bottom Layer w0.33: DSW0.7 39.37,112.649 RP3.2
L10: LQ-RT1052SYS-VS.40
L11: LPUART2.2 LQ-RT1052SYS-VS.38 | length 44.9
  Top Layer w0.33: v2(74.295,44.094) 75.794,44.094 LPUART2.2
  Bottom Layer w0.33: LQ-RT1052SYS-VS.38 63.398,54.991 v2(74.295,44.094)
L12: LQ-RT1052SYS-VS.34
L13: LQ-RT1052SYS-VS.35
L14: LPUART1.3 LQ-RT1052SYS-VS.17 | length 87.8
  Top Layer w0.33: v2(40.335,51.054) 39.827,51.562 39.827,78.689 LQ-RT1052SYS-VS.17
  Bottom Layer w0.33: v2(40.335,51.054) 60.096,51.054 71.349,39.802 90.627,39.802 LPUART1.3
M3: LQ-RT1052SYS-VS.7 str.4 | length 32
  Top Layer w0.33: LQ-RT1052SYS-VS.7 42.774,91.846 45.796,91.846 45.999,91.643 51.333,91.643 52.146,92.456 52.146,96.977 str.4
M4: LQ-RT1052SYS-VS.10 str.5 | length 35.6
  Top Layer w0.33: v2(60.173,91.491) 60.173,102.464 str.5
  Bottom Layer w0.33: LQ-RT1052SYS-VS.10 48.158,90.551 49.098,91.491 v2(60.173,91.491)
M5: LQ-RT1052SYS-VS.14 MT1.2 | length 50.6
  Top Layer w0.33: LQ-RT1052SYS-VS.14 46.609,82.931 46.609,41.021 47.244,40.386 49.657,40.386 MT1.2
M11: LQ-RT1052SYS-VS.39
M12: LPUART2.3 LQ-RT1052SYS-VS.37 | length 58.3
  Bottom Layer w0.33: LQ-RT1052SYS-VS.37 38.837,52.299 38.837,40.538 39.624,39.751 53.289,39.751 56.49,36.551 77.953,36.551 LPUART2.3
M13: LQ-RT1052SYS-VS.15
M14: LQ-RT1052SYS-VS.16
N3: LQ-RT1052SYS-VS.12
NetLED1_1: LED1.1 R1.1 | length 9.7
  Top Layer w1.5: v2(112.776,74.93) 113.472,75.626 LED1.1
  Bottom Layer w1.5: R1.1 v2(112.776,74.93)
NetLED2_1: LED2.1 R2.1 | length 15.5
  Top Layer w0.33: v3(113.919,105.156) 114.442,105.156 v3@114.681,104.917
  Top Layer w1.5: LED2.1 113.472,103.82 113.919,104.267 v3(113.919,105.156)
  Bottom Layer w1.5: R2.1 108.91,105.156 v3(113.919,105.156)
NetLED3_1: LED3.1 R3.1 | length 10.4
  Top Layer w1.5: v3(113.182,53.035) 113.472,52.746 LED3.1
  Bottom Layer w1.5: R3.1 111.328,51.181 v3(113.182,53.035)
NetMT2_3: MT2.3 R33.1 | length 7
  Bottom Layer w0.33: R33.1 62.865,38.227 MT2.3
NetS0_VCC1: S0.1 SWITCH.0 | length 8
  Top Layer w3: SWITCH.0 130.81,104.521 S0.1 S0.1@130.81,105.029
P2: K0.2 LQ-RT1052SYS-VS.9 RP2.1 | length 94.6
  Top Layer w0.33: v2(98.069,73.711) 107.442,64.338 107.442,62.484 K0.2 110.325,62.484 RP2.1
  Bottom Layer w0.33: LQ-RT1052SYS-VS.9 42.799,91.821 47.447,91.821 49.657,94.031 74.549,94.031 75.184,93.396 75.184,84.734 75.692,84.226 81.737,84.226 87.147,78.816 87.147,75.184 87.655,74.676 95.098,74.676 96.063,73.711 v2(98.069,73.711)
pads on no net: GYRO.6 JP0.1 SCR1.1 SCR2.1 SCR3.1 SCR4.1 str.6

## Polygon pours and split planes (outlines as drawn)
GND on Top Layer "Top Layer-No Net" (solid, pour order 4): 35.052,31.623 ccw(c35.179,31.623) 35.179,31.496 135.255,31.496 ccw(c135.255,31.623) 135.382,31.623 135.382,131.699 ccw(c135.255,131.699) 135.255,131.826 35.179,131.826 ccw(c35.179,131.699) 35.052,131.699
GND on Bottom Layer "Top Layer-No Net1" (solid, pour order 5): 35.052,31.623 ccw(c35.179,31.623) 35.179,31.496 135.255,31.496 ccw(c135.255,31.623) 135.382,31.623 135.382,131.699 ccw(c135.255,131.699) 135.255,131.826 35.179,131.826 ccw(c35.179,131.699) 35.052,131.699

## Silkscreen, mask and mechanical layers (free items; w line width, h text height)
Mechanical 1:
  lines w0.254: 35.179,31.623 135.255,31.623 135.255,128.143 35.179,128.143 35.179,31.623

## Text inside footprints (layer, text, board x,y; h text height)
LQ-RT1052SYS-VS: Top Overlay "P2" at 39.401,90.999 h0.8 r270; Top Overlay "H2" at 80.948,101.296 h0.8 r270; Top Overlay "J2" at 74.974,101.166 h0.8 r270; Top Overlay "J1" at 45.433,96.356 h0.8 r270; Top Overlay "J3" at 39.416,98.69 h0.8 r270; Top Overlay "K1" at 39.416,96.099 h0.8 r270; Top Overlay "J4" at 45.433,98.869 h0.8 r270; Top Overlay "D7" at 74.975,98.724 h0.8 r270; Top Overlay "E7" at 80.929,96.111 h0.8 r270; Top Overlay "C7" at 80.949,98.644 h0.8 r270; Top Overlay "L12" at 45.466,61.036 h0.8 r270; Top Overlay "K12" at 45.433,58.259 h0.8 r270; Top Overlay "K11" at 39.416,60.885 h0.8 r270; Top Overlay "L13" at 39.416,58.446 h0.8 r270; Top Overlay "A11" at 80.949,76.267 h0.8 r270; Top Overlay "GND" at 39.446,101.649 h0.8 r270; Top Overlay "5V" at 45.419,101.331 h0.8 r270; Top Overlay "C11" at 74.975,73.642 h0.8 r270; Top Overlay "D12" at 74.979,68.521 h0.8 r270; Top Overlay "G10" at 74.989,58.316 h0.8 r270; Top Overlay "H10" at 74.974,55.911 h0.8 r270; Top Overlay "D11" at 74.975,71.128 h0.8 r270; Top Overlay "E11" at 74.975,65.946 h0.8 r270; Top Overlay "B8" at 74.975,85.911 h0.8 r270; Top Overlay "B12" at 74.975,76.208 h0.8 r270; Top Overlay "B11" at 74.975,78.773 h0.8 r270; Top Overlay "D10" at 74.975,91.372 h0.8 r270; Top Overlay "B9" at 74.975,80.907 h0.8 r270; Top Overlay "C8" at 74.975,83.599 h0.8 r270; Top Overlay "B7" at 74.975,88.476 h0.8 r270; Top Overlay "F12" at 80.954,60.991 h0.8 r270; Top Overlay "F11" at 80.949,63.566 h0.8 r270; Top Overlay "D9" at 74.975,93.714 h0.8 r270; Top Overlay "D8" at 74.949,96.216 h0.8 r270; Top Overlay "A13" at 80.949,71.187 h0.8 r270; Top Overlay "E12" at 80.949,65.955 h0.8 r270; Top Overlay "K10" at 80.949,55.911 h0.8 r270; Top Overlay "C12" at 80.949,68.439 h0.8 r270; Top Overlay "G12" at 80.949,58.511 h0.8 r270; Top Overlay "A8" at 80.949,83.583 h0.8 r270; Top Overlay "A12" at 80.949,73.753 h0.8 r270; Top Overlay "E10" at 80.949,88.84 h0.8 r270; Top Overlay "A10" at 80.949,78.807 h0.8 r270; Top Overlay "A9" at 80.949,80.89 h0.8 r270; Top Overlay "A7" at 80.949,86.199 h0.8 r270; Top Overlay "C10" at 80.949,91.482 h0.8 r270; Top Overlay "B13" at 74.974,63.466 h0.8 r270; Top Overlay "C9" at 80.949,93.709 h0.8 r270; Top Overlay "E8" at 45.418,93.769 h0.8 r270; Top Overlay "M5" at 45.418,86.075 h0.8 r270; Top Overlay "K14" at 45.433,81.336 h0.8 r270; Top Overlay "L10" at 45.433,53.269 h0.8 r270; Top Overlay "N3" at 45.418,88.564 h0.8 r270; Top Overlay "J14" at 45.433,78.681 h0.8 r270; Top Overlay "L11" at 45.433,55.759 h0.8 r270; Top Overlay "M14" at 45.433,83.952 h0.8 r270; Top Overlay "D13" at 45.434,68.526 h0.8 r270; Top Overlay "G14" at 45.433,73.641 h0.8 r270; Top Overlay "B14" at 45.433,63.532 h0.8 r270; Top Overlay "C13" at 45.433,66.047 h0.8 r270; Top Overlay "F14" at 45.433,71.127 h0.8 r270; Top Overlay "H14" at 45.433,76.105 h0.8 r270; Top Overlay "H13" at 39.416,76.185 h0.8 r270; Top Overlay "F13" at 39.416,71.13 h0.8 r270; Top Overlay "D14" at 39.416,66.126 h0.8 r270; Top Overlay "C14" at 39.416,63.51 h0.8 r270; Top Overlay "G13" at 39.416,73.619 h0.8 r270; Top Overlay "E14" at 39.416,68.565 h0.8 r270; Top Overlay "L6" at 39.416,86.029 h0.8 r270; Top Overlay "M12" at 39.416,55.759 h0.8 r270; Top Overlay "J13" at 39.416,78.79 h0.8 r270; Top Overlay "L5" at 39.401,88.561 h0.8 r270; Top Overlay "L14" at 39.416,81.091 h0.8 r270; Top Overlay "M13" at 39.389,83.961 h0.8 r270; Top Overlay "M3" at 39.401,93.59 h0.8 r270; Top Overlay "H12" at 74.984,53.256 h0.8 r270; Top Overlay "M4" at 45.418,91.256 h0.8 r270; Top Overlay "M11" at 39.416,53.334 h0.8 r270; Top Overlay "GND" at 39.399,51.121 h0.8 r270; Top Overlay "J12" at 74.994,50.596 h0.8 r270; Top Overlay "L7" at 45.439,50.271 h0.8 r270; Top Overlay "J11" at 80.959,50.867 h0.8 r270; Top Overlay "H11" at 80.949,53.331 h0.8 r270; Top Overlay "G11" at 74.975,61.004 h0.8 r270
SOURCETEST: Top Overlay "1" at 124.028,89.281 h1 r180; Top Overlay "3" at 119.928,89.351 h1 r180